# EAGLE board stepper001 (EAGLE 7.1.0)
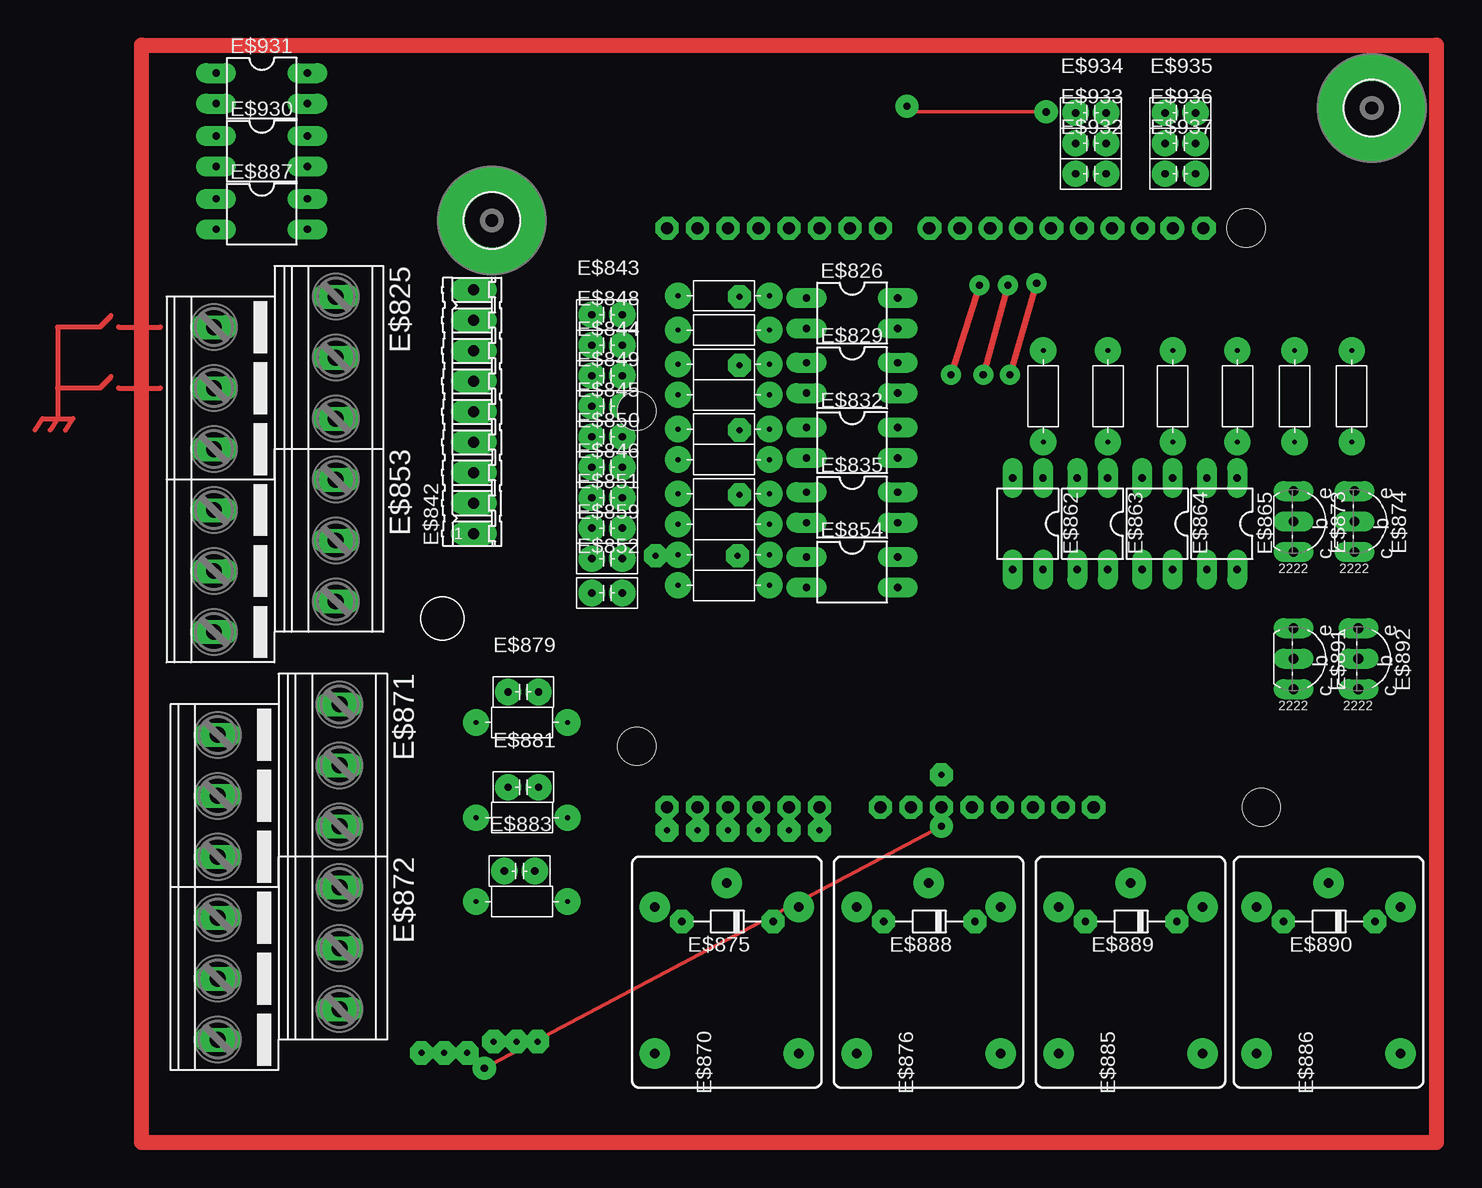
[diagram p0: board, top side]
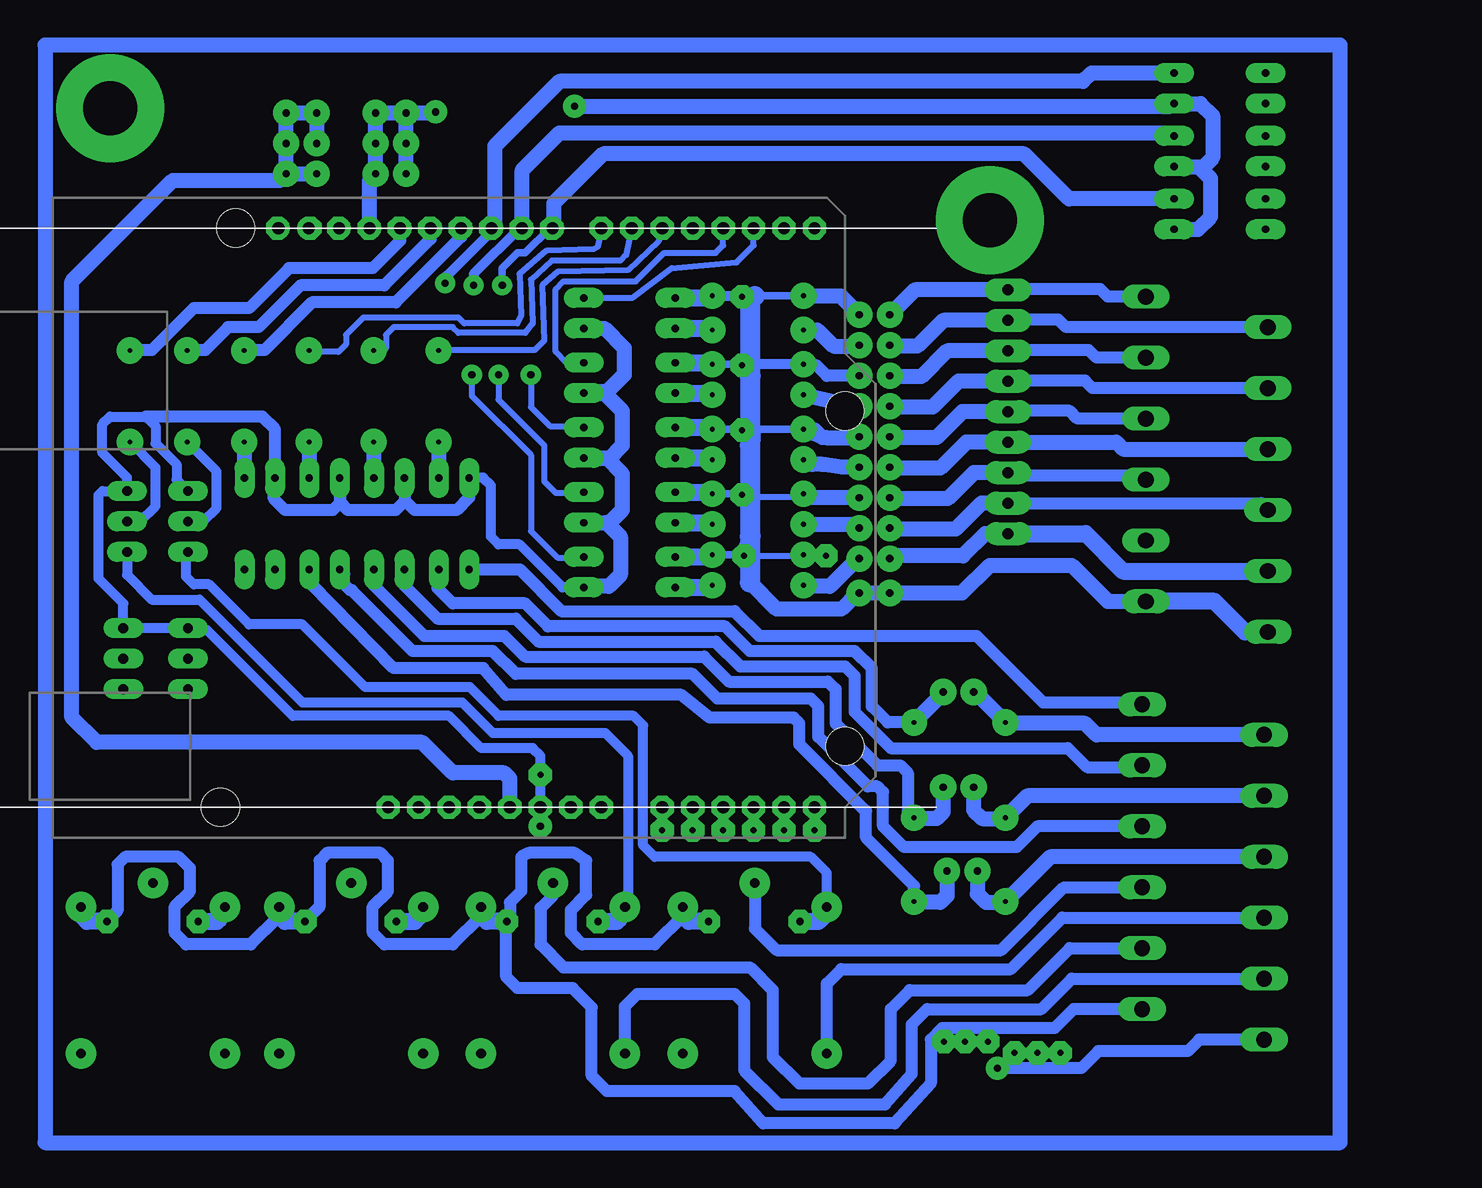
[diagram p1: board, bottom side, seen from below]

No outline drawn. Coordinates in mm, seen from the top.
Copper layers (1*16): Top 0.035mm / dielectric 1.5mm / Bottom 0.035mm
Design rules "default": minimum track width 10mil, minimum drill 24mil, track to track 8mil, track to pad 8mil, pad to pad 8mil, via to via 8mil, smd to smd 8mil, copper to edge 40mil, drill to drill 8mil, minimum pad ring 10mil, minimum via ring 8mil, stop-mask expansion 4mil, vias tented up to drill 0mil, thermal gap 10mil

## Footprints (pad centres in the part's own frame; a part is rotated, then mirrored left to right if it is on the bottom)
HOLES = drill 4.5 pad 9: B4,5 0,0
TESTPAD32 = drill 0.5 pad 1.93 octagon: P$1 0,0
ARDUINO-UNOR3 = drill 1.016 pad 1.93: 3.3V 35.56,2.54; 5V 38.1,2.54; A0 50.8,2.54; A1 53.34,2.54; A2 55.88,2.54; A3 58.42,2.54; A4 60.96,2.54; A5 63.5,2.54; AREF 23.876,50.8; D0 63.5,50.8; D1 60.96,50.8; D2 58.42,50.8; D3 55.88,50.8; D4 53.34,50.8; D5 50.8,50.8; D6 48.26,50.8; D7 45.72,50.8; D8 41.656,50.8; D9 39.116,50.8; D10 36.576,50.8; D11 34.036,50.8; D12 31.496,50.8; D13 28.956,50.8; GND@1 40.64,2.54; GND@2 43.18,2.54; GND@3 26.416,50.8; IOREF 30.48,2.54; NC 27.94,2.54; RESET@1 33.02,2.54; SCL 18.796,50.8; SDA 21.336,50.8; VIN 45.72,2.54 | hole 3.175: 15.24,50.8; 66.04,35.56; 66.04,7.62; 13.97,2.54
MKKDS03 = drill 1.321 long: 1 -3.81,-5.08; 2 1.27,-5.08; 3 6.35,-5.08; 4 -6.35,5.08; 5 -1.27,5.08; 6 3.81,5.08
DIL04 = drill 0.61 pad 1.676 long: 1 -1.27,-3.81; 2 1.27,-3.81; 3 1.27,3.81; 4 -1.27,3.81
R7-5 = drill 0.406 pad 2.184: P$1 -3.81,0; P$2 3.81,0
09P = drill 0.914 pad 1.93 long: 1 -10.16,0; 2 -7.62,0; 3 -5.08,0; 4 -2.54,0; 5 0,0; 6 2.54,0; 7 5.08,0; 8 7.62,0; 9 10.16,0
C2-2 = drill 0.61 pad 2.184: 1 -1.27,0; 2 1.27,0
JS-M = drill 0.8 pad 2.54: 1 6.7,6; 2 6.7,-6; C 8.7,0; NC -5.5,-6; NO -5.5,6
PN2222A = drill 0.813 pad 1.676 long: B 2.54,0; C 0,0; E -2.54,0
D-5 = drill 0.61 pad 1.93 octagon: A 3.81,0; C -3.81,0

## Placement (x,y rotation side)
E$1  [HOLES]  108.9,91.28 0 top
E$2  [HOLES]  35.56,81.92 0 top
E$3  [HOLES2]  31.43,48.74 0 top
E$4  [TESTPAD32]  52.7,81.28 0 top
E$5  [TESTPAD32]  50.16,81.28 0 top
E$6  [TESTPAD32]  92.23,81.28 0 top
E$7  [TESTPAD32]  94.93,81.28 0 top
E$8  [TESTPAD32]  67.94,33.02 0 top
E$9  [TESTPAD32]  78.11,33.02 0 top
E$10  [TESTPAD32]  80.64,33.02 0 top
E$11  [TESTPAD32]  83.19,33.02 0 top
E$12  [TESTPAD32]  85.72,33.02 0 top
E$824  [ARDUINO-UNOR3]  113.67,30.48 0 bottom
E$825  [MKKDS03]  17.46,69.22 270 top
E$826  [DIL04]  65.59,74.2 270 top
E$827  [R7-5]  54.89,75.64 180 top
E$828  [R7-5]  54.89,72.79 180 top
E$829  [DIL04]  65.59,68.8 270 top
E$830  [R7-5]  54.89,69.93 180 top
E$831  [R7-5]  54.89,67.39 180 top
E$832  [DIL04]  65.59,63.4 270 top
E$833  [R7-5]  54.89,64.53 180 top
E$834  [R7-5]  54.89,61.99 180 top
E$835  [DIL04]  65.59,58 270 top
E$836  [R7-5]  54.89,59.13 180 top
E$837  [R7-5]  54.89,56.59 180 top
E$840  [R7-5]  54.89,54.05 180 top
E$841  [R7-5]  54.89,51.51 180 top
E$842  [09P]  34.05,65.98 90 top
E$843  [C2-2]  45.16,74.06 0 top
E$844  [C2-2]  45.16,68.98 0 top
E$845  [C2-2]  45.16,63.9 0 top
E$846  [C2-2]  45.16,58.82 0 top
E$847  [TESTPAD32]  56.2,59.05 0 top
E$848  [C2-2]  45.16,71.52 0 top
E$849  [C2-2]  45.16,66.44 0 top
E$850  [C2-2]  45.16,61.36 0 top
E$851  [C2-2]  45.16,56.28 0 top
E$852  [C2-2]  45.16,50.88 0 top
E$853  [MKKDS03]  17.46,53.98 270 top
E$854  [DIL04]  65.59,52.61 270 top
E$855  [TESTPAD32]  56.2,75.56 0 top
E$856  [TESTPAD32]  56.2,69.85 0 top
E$857  [TESTPAD32]  56.2,64.45 0 top
E$858  [TESTPAD32]  56.04,53.98 0 top
E$859  [C2-2]  45.16,53.74 0 top
E$861  [TESTPAD32]  49.21,53.98 0 top
E$862  [DIL04]  80.23,56.65 180 top
E$863  [DIL04]  85.63,56.65 180 top
E$864  [DIL04]  91.02,56.65 180 top
E$865  [DIL04]  96.42,56.65 180 top
E$866  [R7-5]  81.52,67.27 270 top
E$867  [R7-5]  86.92,67.27 270 top
E$868  [R7-5]  92.31,67.27 270 top
E$869  [R7-5]  97.71,67.27 270 top
E$870  [JS-M]  55.14,18 90 top
E$871  [MKKDS03]  17.78,35.24 270 top
E$872  [MKKDS03]  17.78,20 270 top
E$873  [PN2222A]  102.39,56.83 270 top
E$874  [PN2222A]  107.47,56.83 270 top
E$875  [D-5]  55.19,23.5 180 top
E$876  [JS-M]  71.97,18 90 top
E$877  [R7-5]  102.47,67.27 270 top
E$878  [R7-5]  107.24,67.27 270 top
E$879  [C2-2]  38.18,42.62 0 top
E$880  [R7-5]  38.06,40.08 180 top
E$881  [C2-2]  38.18,34.69 0 top
E$882  [R7-5]  38.06,32.15 180 top
E$883  [C2-2]  37.86,27.7 0 top
E$884  [R7-5]  38.06,25.16 180 top
E$885  [JS-M]  88.8,18 90 top
E$886  [JS-M]  105.31,18 90 top
E$887  [DIL04]  16.38,82.45 270 top
E$888  [D-5]  72.02,23.5 180 top
E$889  [D-5]  88.85,23.5 180 top
E$890  [D-5]  105.36,23.5 180 top
E$891  [PN2222A]  102.39,45.4 270 top
E$892  [PN2222A]  107.79,45.4 270 top
E$893  [TESTPAD32]  50.16,31.11 0 top
E$894  [TESTPAD32]  52.7,31.11 0 top
E$895  [TESTPAD32]  55.24,31.11 0 top
E$896  [TESTPAD32]  57.78,31.11 0 top
E$897  [TESTPAD32]  60.33,31.11 0 top
E$898  [TESTPAD32]  62.87,31.11 0 top
E$899  [TESTPAD32]  50.16,33.02 0 top
E$900  [TESTPAD32]  52.7,33.02 0 top
E$901  [TESTPAD32]  55.24,33.02 0 top
E$902  [TESTPAD32]  57.78,33.02 0 top
E$903  [TESTPAD32]  60.33,33.02 0 top
E$904  [TESTPAD32]  62.87,33.02 0 top
E$905  [TESTPAD32]  73.03,33.02 0 top
E$906  [TESTPAD32]  55.24,81.28 0 top
E$907  [TESTPAD32]  57.78,81.28 0 top
E$908  [TESTPAD32]  62.87,81.28 0 top
E$909  [TESTPAD32]  65.41,81.28 0 top
E$910  [TESTPAD32]  67.94,81.28 0 top
E$911  [TESTPAD32]  60.33,81.28 0 top
E$912  [TESTPAD32]  72.07,81.28 0 top
E$913  [TESTPAD32]  74.61,81.28 0 top
E$914  [TESTPAD32]  77.15,81.28 0 top
E$915  [TESTPAD32]  79.69,81.28 0 top
E$916  [TESTPAD32]  82.23,81.28 0 top
E$917  [TESTPAD32]  84.77,81.28 0 top
E$918  [TESTPAD32]  87.31,81.28 0 top
E$919  [TESTPAD32]  89.85,81.28 0 top
E$920  [TESTPAD32]  75.56,33.02 0 top
E$921  [TESTPAD32]  70.48,33.02 0 top
E$922  [TESTPAD32]  73.03,35.72 0 top
E$923  [TESTPAD32]  33.5,12.54 0 top
E$924  [TESTPAD32]  31.59,12.54 0 top
E$925  [TESTPAD32]  29.69,12.54 0 top
E$926  [TESTPAD32]  35.72,13.49 0 top
E$927  [TESTPAD32]  37.62,13.49 0 top
E$928  [TESTPAD32]  39.37,13.49 0 top
E$930  [DIL04]  16.38,87.69 270 top
E$931  [DIL04]  16.38,92.93 270 top
E$932  [C2-2]  85.49,85.8 0 top
E$933  [C2-2]  85.49,88.34 0 top
E$934  [C2-2]  85.49,90.88 0 top
E$935  [C2-2]  92.95,90.88 0 top
E$936  [C2-2]  92.95,88.34 0 top
E$937  [C2-2]  92.95,85.8 0 top

## Library data of the parts
E$1-E$12 E$824 E$843-E$852 E$855-E$859 E$861 E$879 E$881 E$883 E$893-E$928 E$932-E$937 = PERSONAL
E$825 E$853 E$871 E$872 = con-phoenix-508
E$826 E$829 E$832 E$835 E$854 E$862-E$865 E$887 E$930 E$931 = ic-package
E$827 E$828 E$830 E$831 E$833 E$834 E$836 E$837 E$840 E$841 E$866-E$869 E$877 E$878 E$880 E$882 E$884 = PERSONAL2
E$842 = con-amp-quick
E$870 E$876 E$885 E$886 = relay
E$873 E$874 E$891 E$892 = PERSONAL6
E$875 E$888-E$890 = diode

## Nets
S$608: E$826.1 E$827.P$1 E$855.P$1
S$609: E$826.2 E$828.P$1
S$610: E$829.1 E$830.P$1 E$856.P$1
S$611: E$829.2 E$831.P$1
S$612: E$832.1 E$833.P$1 E$857.P$1
S$613: E$832.2 E$834.P$1
S$614: E$835.1 E$836.P$1 E$840.P$1 E$840.P$2 E$847.P$1 E$854.1 E$858.P$1
S$615: E$835.2 E$837.P$1
S$616: E$870.C E$872.4
S$617: E$841.P$1 E$854.2
S$618: E$824.D8 E$832.4 E$887.4
S$619: E$825.4 E$842.9 E$843.1
S$620: E$825.5 E$842.7 E$844.1
S$621: E$825.6 E$842.5 E$845.1
S$622: E$842.3 E$846.1 E$853.4
S$623: E$841.P$2 E$859.2
S$624: E$828.P$2 E$848.2
S$625: E$831.P$2 E$849.2
S$626: E$834.P$2 E$850.2
S$627: E$837.P$2 E$851.2
S$628: E$842.1 E$853.2 E$859.1
S$629: E$870.NO E$872.1
S$630: E$842.2 E$851.1 E$853.1
S$631: E$825.3 E$842.4 E$850.1
S$632: E$824.D9 E$835.4 E$930.4
S$633: E$825.2 E$842.6 E$849.1
S$634: E$825.1 E$842.8 E$848.1
S$635: E$827.P$2 E$830.P$2 E$833.P$2 E$836.P$2 E$843.2 E$844.2 E$845.2 E$846.2 E$852.1 E$852.2 E$853.3 E$853.6
S$636: E$824.D2 E$826.4
S$642: E$872.5 E$876.C
S$643: E$872.2 E$876.NO
S$645: E$824.D3 E$829.4
S$646: E$824.D10 E$854.4 E$931.4
S$647: E$862.1 E$866.P$2
S$648: E$824.GND@1 E$826.3 E$829.3 E$832.3 E$835.3 E$854.3 E$862.2 E$863.2 E$864.2 E$865.2 E$872.3 E$873.E E$874.E E$891.E E$892.E
S$649: E$863.1 E$867.P$2
S$650: E$864.1 E$868.P$2
S$651: E$865.1 E$869.P$2
S$652: E$824.D5 E$866.P$1
S$656: E$824.D6 E$867.P$1
S$657: E$824.D7 E$868.P$1
S$658: E$824.D12 E$877.P$1
S$660: E$873.C E$877.P$2
S$661: E$874.C E$878.P$2
S$662: E$870.1 E$873.B E$875.A
S$663: E$874.B E$876.1 E$888.A
S$664: E$862.3 E$871.4
S$665: E$862.4 E$879.2 E$880.P$1
S$666: E$871.1 E$879.1 E$880.P$2
S$667: E$863.3 E$871.5
S$668: E$863.4 E$881.2 E$882.P$1
S$669: E$871.2 E$881.1 E$882.P$2
S$670: E$864.3 E$871.6
S$671: E$864.4 E$883.2 E$884.P$1
S$672: E$871.3 E$883.1 E$884.P$2
S$673: E$824.D11 E$869.P$1
S$674: E$824.D13 E$878.P$1
S$675: E$870.2 E$872.6 E$875.C E$876.2 E$885.2 E$886.2 E$888.C E$889.C E$890.C
S$676: E$824.GND@3 E$887.3 E$930.3 E$931.3 E$932.1 E$932.2 E$933.1 E$933.2 E$934.1 E$934.2
S$677: E$885.1 E$889.A
S$678: E$824.5V E$935.1 E$935.2 E$936.1 E$936.2 E$937.1 E$937.2
S$679: E$886.1 E$890.A

## Tracks (layer width: path | path; a pad name or v marks a point on that pad's centre or on a via)
S$608
  Bottom 0.813: E$827.P$1 56.28,75.64 E$855.P$1
  Bottom 1.422: E$826.1 58.88,75.47 E$827.P$1
S$609
  Bottom 1.422: E$826.2 58.84,72.93 E$828.P$1
S$610
  Bottom 0.61: E$830.P$1 56.28,69.93 E$856.P$1
  Bottom 1.422: E$829.1 58.84,70.07 E$830.P$1
S$611
  Bottom 1.422: E$829.2 58.84,67.53 E$831.P$1
S$612
  Bottom 0.61: E$833.P$1 56.28,64.53 E$857.P$1
  Bottom 1.422: E$832.1 58.84,64.67 E$833.P$1
S$613
  Bottom 1.422: E$832.2 58.84,62.13 E$834.P$1
S$614
  Bottom 0.508: E$858.P$1 51.16,53.98 E$840.P$2
  Bottom 0.61: E$836.P$1 56.28,59.13 E$847.P$1 56.2,58.58 55.56,57.94 55.56,54.45 E$858.P$1 | E$840.P$1 56.12,54.05
  Bottom 1.422: E$835.1 58.84,59.27 E$836.P$1 | E$854.1 58.88,53.88 E$840.P$1 | 56.12,54.05 E$858.P$1
  Bottom 1.676: 55.56,54.93 E$858.P$1
S$615
  Bottom 1.422: E$835.2 58.84,56.73 E$837.P$1
S$616
  Bottom 1.016: E$870.C 55.14,22.91 53.34,21.11 34.61,21.11 29.37,26.35 E$872.4
S$617
  Bottom 1.422: E$854.2 58.88,51.34 E$841.P$1
S$618  (via drill 0.6 pad 1.68)
  Top 0.508: v76.2,76.52 v73.82,69.06
  Bottom 0.508: 75.56,76.52 v76.2,76.52 | v73.82,69.06 73.82,66.36 72.23,64.77 69.5,64.77 E$832.4
  Bottom 0.61: 72.07,81.28 72.23,81.28 74.3,79.22 74.93,79.22 76.2,77.95 v76.2,76.52
  Bottom 0.813: E$824.D8 72.07,81.28
  Bottom 1.27: E$887.4 28.95,83.72 32.7,87.47 67.79,87.47 71.91,83.34 71.91,81.38 E$824.D8
S$619
  Bottom 1.016: E$825.4 25.72,75.56 26.35,76.2 33.99,76.2 E$842.9
  Bottom 1.27: E$842.9 41.81,76.14 E$843.1
S$620
  Bottom 1.016: E$825.5 26.67,70.48 27.3,71.12 33.99,71.12 E$842.7
  Bottom 1.27: E$842.7 39.11,71.06 41.27,68.9 43.81,68.9 E$844.1
S$621
  Bottom 1.016: E$825.6 28.26,65.41 28.89,66.04 33.99,66.04 E$842.5
  Bottom 1.27: E$842.5 37.84,65.98 40.01,63.82 43.81,63.82 E$845.1
S$622
  Bottom 1.016: E$853.4 23.5,60.33 23.81,60.64 33.79,60.64 E$842.3
  Bottom 1.27: E$842.3 36.89,60.9 39.05,58.74 43.81,58.74 E$846.1
S$623
  Bottom 1.27: E$859.2 46.59,53.74 48.9,51.44 51,51.44 E$841.P$2
S$624
  Bottom 1.27: E$828.P$2 49.93,72.79 48.58,71.44 46.51,71.44 E$848.2
S$625
  Bottom 1.27: E$831.P$2 46.75,66.44 E$849.2
S$626
  Bottom 1.27: E$850.2 47.86,61.36 49.53,61.59 50.37,61.59 E$834.P$2
S$627
  Bottom 1.27: E$837.P$2 46.75,56.59 E$851.2
S$628
  Bottom 1.27: E$842.1 35.94,55.82 37.78,53.98 43.66,53.98 E$859.1
  Bottom 1.422: E$842.1 27.56,55.82 24.45,52.7 E$853.2
S$629
  Bottom 1.016: E$870.NO 49.14,18.33 47.94,19.53 33.81,19.53 29.53,23.81 E$872.1
S$630
  Bottom 1.016: E$842.2 12.96,58.36 E$853.1
  Bottom 1.27: E$842.2 36.26,58.36 38.42,56.2 43.81,56.2 E$851.1
S$631
  Bottom 1.016: 33.99,63.5 E$842.4
  Bottom 1.27: E$850.1 43.81,61.28 39.69,61.28 37.52,63.44 E$842.4 25.02,63.44 24.45,62.87 E$825.3
S$632  (via drill 0.6 pad 1.68)
  Top 0.508: v78.58,76.52 v76.52,69.06
  Bottom 0.508: v76.52,69.06 76.52,66.99 72.71,63.18 72.71,60.17 71.75,59.21 69.46,59.21 E$835.4
  Bottom 0.813: E$824.D9 74.77,81.28 78.58,77.47 v78.58,76.52
  Bottom 1.27: E$824.D9 74.55,86.11 71.44,89.22 20.45,89.22 E$930.4
S$633
  Bottom 1.016: E$825.2 26.99,67.94 27.62,68.58 33.99,68.58 E$842.6
  Bottom 1.27: E$842.6 38.16,68.52 40.32,66.36 43.81,66.36 E$849.1
S$634
  Bottom 1.016: E$825.1 29.21,73.03 29.84,73.66 33.99,73.66 E$842.8
  Bottom 1.27: E$842.8 39.43,73.6 41.59,71.44 43.81,71.44 E$848.1
S$635
  Bottom 0.508: 50.16,64.45 55.4,64.45 55.4,59.21 55.09,58.9 51.32,58.9 E$836.P$2
  Bottom 0.61: E$827.P$2 55.17,75.64 | E$833.P$2 55.48,64.53
  Bottom 0.813: E$830.P$2 55.48,69.93 55.56,69.85
  Bottom 1.016: E$844.2 49.13,68.98 50.01,69.85 51,69.85 E$830.P$2
  Bottom 1.27: E$827.P$2 48.02,75.64 E$843.2 | E$844.2 | E$833.P$2 50.4,64.21 49.21,63.82 | 49.21,63.82 46.51,63.82 E$845.2 | E$846.2 50.76,58.82 E$836.P$2 | 55.56,51.75 53.34,49.53 47.94,49.53 46.59,50.88 E$852.2 E$852.1 37.86,50.88 35.56,53.18 28.73,53.18 25.72,50.16 E$853.6 | 49.21,63.82 49.53,63.82 50.16,64.45
  Bottom 1.422: E$853.3 14.29,47.62 16.83,50.16 E$853.6
  Bottom 1.676: 55.17,75.64 55.56,75.25 55.56,69.85 55.56,68.9 | 55.56,68.9 55.56,63.18 | 55.56,63.18 55.56,55.56 | 55.56,55.56 55.56,51.75 | 55.48,68.98 55.56,68.9 | 55.48,64.53 55.56,63.18 | 55.48,55.64 55.56,55.56
S$636
  Bottom 0.508: E$826.4 65.35,75.47 62.07,77.95 56.67,78.42 55.24,79.85 E$824.D2
S$637
  Top 0.406: 3.81,73.98 2.86,73.03 -0.64,73.03 -0.64,65.41 -1.27,64.45
S$638
  Top 0.406: 4.45,73.03 7.94,73.03
S$639
  Top 0.406: 3.81,68.9 2.86,67.94 -0.64,67.94
S$640
  Top 0.406: 4.45,67.94 7.94,67.94
S$641
  Top 0.406: -2.54,64.45 -1.91,65.41 0.64,65.41 0,64.45
S$642
  Bottom 1.016: E$876.C 71.97,25.66 73.03,24.61 73.03,21.59 71.12,19.68 55.56,19.68 53.66,17.78 53.66,12.22 51.44,10 45.72,10 43.81,11.91 43.81,16.19 42.23,17.78 32.38,17.78 28.89,21.27 E$872.5
S$643
  Bottom 1.016: E$876.NO 65.97,16.42 64.93,17.46 56.83,17.46 56.04,16.67 56.04,11.11 53.18,8.26 44.29,8.26 42.07,10.79 42.07,14.92 40.8,16.19 31.27,16.19 28.73,18.73 E$872.2
S$645
  Bottom 0.508: E$829.4 70.86,70.07 71.75,70.96 71.75,76.2 71.12,76.83 65.09,76.83 62.71,79.22 58.42,79.22 57.78,79.85 E$824.D3
S$646  (via drill 0.6 pad 1.68)
  Top 0.508: v80.96,76.68 v78.74,69.06
  Bottom 0.508: v78.74,69.06 78.74,67.31 73.82,62.39 73.82,56.04 71.6,53.82 69.46,53.82 E$854.4
  Bottom 0.813: E$824.D10 77.09,81.03 80.8,77.31 80.8,76.83 v80.96,76.68
  Bottom 1.27: E$931.4 27.09,94.2 27.78,93.5 71.44,93.5 76.83,88.11 76.83,81.53 E$824.D10
S$647
  Bottom 1.27: E$866.P$2 81.52,60.48 E$862.1
S$648  (via drill 0.6 pad 1.93)
  Top 0.305: v34.92,11.27 v73.03,31.43
  Bottom 0.813: E$873.E 103.35,60.33 103.35,61.59 105.09,63.34 105.09,64.77 105.89,65.56 108.9,65.56 109.54,64.93 109.54,62.55 107.47,60.48 E$874.E 109.54,59.37 109.86,59.05 109.86,52.07 107.79,50.01 E$892.E E$891.E 102.23,47.78 100.81,47.78 93.66,40.64 80.64,40.64 77.95,37.94 73.66,37.94 73.03,37.31 E$824.GND@1 | E$854.3 71.18,51.34 74.77,54.93 76.52,54.93 77.15,55.56 77.15,59.85 77.79,60.48 78.93,60.48 E$862.2
  Bottom 1.016: E$862.2 78.96,58.84 80.01,57.78 83.5,57.78 84.3,58.58 84.3,60.4 E$863.2 84.36,58.52 85.09,57.78 89.06,57.78 89.69,58.42 89.69,60.4 E$864.2 89.75,58.36 90.33,57.78 94.3,57.78 95.25,58.74 95.25,60.36 E$865.2 95.15,64.51 96.2,65.56 105.89,65.56 | E$872.3 18.1,13.65 19.05,12.7 26.51,12.7 27.94,11.27 v34.92,11.27
  Bottom 1.27: E$826.3 67.69,72.93 66.04,71.28 66.04,69.06 67.47,67.63 69.3,67.63 E$829.3 67.69,67.53 66.2,66.04 66.2,63.18 67.31,62.07 69.34,62.07 E$832.3 67.53,62.13 66.2,60.8 66.2,57.78 67.31,56.67 69.34,56.67 E$835.3 67.53,56.73 66.36,55.56 66.36,52.39 67.31,51.44 69.3,51.44 E$854.3 | v73.03,31.43 E$824.GND@1
S$649
  Bottom 1.27: E$867.P$2 86.92,60.48 E$863.1
S$650
  Bottom 1.27: E$868.P$2 92.31,60.48 E$864.1
S$651
  Bottom 1.27: E$869.P$2 97.71,60.48 E$865.1
S$652
  Bottom 0.508: E$824.D5 63.18,80.17 65.72,77.79 71.6,77.63 72.87,76.52 72.71,71.91 73.5,71.12 81.48,71.12 E$866.P$1
S$656
  Bottom 0.508: E$824.D6 65.88,79.06 66.36,78.58 72.07,78.58 73.82,76.99 73.66,73.34 74.3,72.55 79.85,72.55 80.33,73.03 85.25,73.03 85.88,72.39 85.88,71.28 86.04,71.12 86.88,71.12 E$867.P$1
S$657
  Bottom 0.508: E$824.D7 68.26,79.69 68.58,79.53 72.55,79.38 74.77,77.47 74.61,73.98 74.93,73.34 79.38,73.34 79.85,73.82 87.79,73.82 89.22,72.39 89.22,71.6 89.85,70.96 92.19,70.96 E$868.P$1
S$658
  Bottom 1.016: E$824.D12 82.17,80.39 86.04,76.52 93.03,76.52 96.52,73.03 99.06,73.03 100.97,71.12 102.44,71.12 E$877.P$1
S$660
  Bottom 0.813: E$873.C 101.12,56.83 100.01,57.94 100.01,61 E$877.P$2
S$661
  Bottom 0.813: E$874.C 106.36,56.83 105.09,58.1 105.09,61.32 E$878.P$2
S$662
  Bottom 0.813: E$870.1 49.14,27.55 50.48,28.89 63.5,28.89 64.45,29.84 64.45,39.85 65.25,40.64 76.52,40.64 78.9,43.02 87.63,43.02 92.87,48.26 97.31,48.26 100.65,51.59 101.92,51.59 102.55,52.23 102.55,54.13 E$873.B
  Bottom 1.422: E$870.1 49.14,24.2 49.85,23.5 E$875.A
S$663
  Bottom 0.813: E$874.B 107.47,52.39 105.41,50.32 101.44,50.32 92.87,41.75 79.53,41.75 76.99,39.21 67.63,39.21 65.72,37.31 65.72,24.95 E$876.1
  Bottom 1.422: E$888.A 66.67,23.5 66.36,23.81 66.36,24.31 E$876.1
S$664
  Bottom 1.016: E$862.3 74.75,52.84 71.28,49.37 56.83,49.37 54.77,47.31 36.67,47.31 31.11,41.75 23.02,41.75 E$871.4
S$665
  Bottom 1.016: E$880.P$1 44.05,40.08 45.4,41.43 45.4,44.61 46.83,46.04 55.56,46.04 57.63,48.1 72.39,48.1 74.3,50.01 80.33,50.01 81.6,51.28 81.6,52.74 E$862.4
  Bottom 1.27: E$879.2 39.45,42.51 E$880.P$1
S$666
  Bottom 1.27: E$879.1 36.79,42.62 E$880.P$2 34.17,40.01 27.62,40.01 26.67,39.05 E$871.1
S$667
  Bottom 1.016: E$863.3 84.36,51.49 81.6,48.74 75.09,48.74 73.18,46.83 58.42,46.83 56.36,44.77 47.62,44.77 46.83,43.97 46.83,40.96 43.81,37.94 29.05,37.94 27.46,36.35 23.02,36.35 E$871.5
S$668
  Bottom 1.016: E$863.4 86.9,51.49 82.71,47.31 76.04,47.31 74.3,45.56 59.37,45.56 57.31,43.5 49.05,43.5 48.42,42.86 48.42,40.01 44.93,36.51 43.02,36.51 42.39,35.88 42.39,32.66 E$882.P$1
  Bottom 1.27: E$881.2 39.45,32.62 40.01,32.07 41.79,32.07 E$882.P$1
S$669
  Bottom 1.27: E$871.2 32.42,33.97 E$882.P$2 34.33,32.07 36.2,32.07 36.91,32.78 E$881.1
S$670
  Bottom 1.016: E$871.6 31.59,31.43 33.34,29.69 42.7,29.69 44.45,31.43 44.45,34.29 44.93,34.77 45.72,34.77 49.85,38.89 49.85,41.43 50.48,42.07 58.26,42.07 60.33,44.13 75.09,44.13 76.99,46.04 83.66,46.04 88.74,51.12 88.9,51.12 89.38,51.59 89.38,52.46 E$864.3
S$671
  Bottom 1.016: E$884.P$1 41.87,26.47 45.88,30.48 45.88,32.7 51.44,38.26 51.44,40.01 51.91,40.48 58.9,40.48 61.28,42.39 75.88,42.39 77.79,44.61 85.25,44.61 92.08,51.59 92.08,52.62 E$864.4
  Bottom 1.27: E$883.2 39.13,25.64 39.69,25.08 41.79,25.08 E$884.P$1
S$672
  Bottom 1.27: E$871.3 30.52,28.89 E$884.P$2 34.33,25.08 35.88,25.08 36.59,25.8 E$883.1
S$673
  Bottom 1.016: E$824.D11 79.63,80.55 85.09,75.09 92.08,75.09 96.04,71.12 97.67,71.12 E$869.P$1
S$674
  Bottom 1.016: E$824.D13 84.71,80.23 87,77.95 93.98,77.95 97.31,74.61 101.92,74.61 105.41,71.12 107.2,71.12 E$878.P$1
S$675
  Bottom 1.016: E$870.2 61.14,23.95 63.5,21.59 69.53,21.59 70.48,22.54 70.48,24.45 69.22,25.72 69.22,28.57 70.17,29.21 73.98,29.21 74.61,28.89 74.61,26.04 75.56,25.08 75.56,23.77 E$888.C 75.88,23.45 75.88,18.89 74.93,17.94 70.33,17.94 68.74,16.35 68.74,10.64 67.47,9.37 56.83,9.37 54.45,6.67 43.5,6.67 40.48,10 40.48,13.65 39.53,14.61 30.16,14.61 28.57,16.19 E$872.6 | E$876.2 77.97,23.95 80.33,21.59 86.04,21.59 87,22.54 87,24.77 85.72,26.04 85.72,28.57 86.36,29.21 90.81,29.21 91.44,28.57 91.44,24.72 E$889.C | 94.93,24.13 94.93,23.81 97.16,21.59 102.55,21.59 103.5,22.54 103.5,24.77 102.23,26.04 102.23,27.94 103.19,28.89 107.63,28.89 108.27,28.26 108.27,24.4 E$890.C
  Bottom 1.422: E$875.C 60.65,23.5 60.96,23.81 60.96,24.52 E$870.2 | E$888.C 77.48,23.5 77.79,23.81 77.79,24.52 E$876.2 | E$889.C 94.31,23.5 94.93,24.13 94.93,24.57 E$885.2 | E$890.C 110.82,23.5 111.44,24.13 111.44,24.57 E$886.2
S$676  (via drill 0.6 pad 1.93)
  Top 0.305: v81.76,90.96 70.64,90.96 v70.17,91.44
  Bottom 1.27: E$824.GND@3 87.25,85.31 E$932.2 E$933.2 E$934.2 E$934.1 | E$932.1 E$933.1 E$934.1 | E$934.1 81.84,90.88 v81.76,90.96 | v70.17,91.44 20.41,91.44 E$931.3 18,91.66 16.99,90.65 16.99,87.15 17.94,86.2 | E$887.3 18.2,81.18 17.14,82.23 17.14,85.41 17.94,86.2 | 17.94,86.2 18.1,86.36 20.13,86.36 E$930.3
S$677
  Bottom 1.422: E$889.A 83.49,23.5 82.87,24.13 82.87,24.63 E$885.1
S$678
  Bottom 1.27: E$824.5V 75.56,35.4 76.04,35.88 80.33,35.88 82.87,38.42 110.01,38.42 112.08,40.48 112.08,76.83 103.66,85.25 94.77,85.25 E$937.2 | E$937.2 E$937.1 | E$937.2 E$936.2 E$935.2 E$935.1 E$936.1
S$679
  Bottom 1.422: E$890.A 100,23.5 99.69,23.81 99.69,24.31 E$886.1
S$680
  Bottom 1.27: 6.35,96.52 114.3,96.52 114.3,5.08 6.35,5.08 6.35,96.52
S$681
  Top 1.27: 6.35,96.52 114.3,96.52 114.3,5.08 6.35,5.08 6.35,96.52

## Text on the board
tValues: LED - | LED - | LED - | LED - | LED - | COMMON POSITIVE FROM EXT POWER 1